# EAGLE board Powerswitch 2 Dioda (EAGLE 9.6.2)
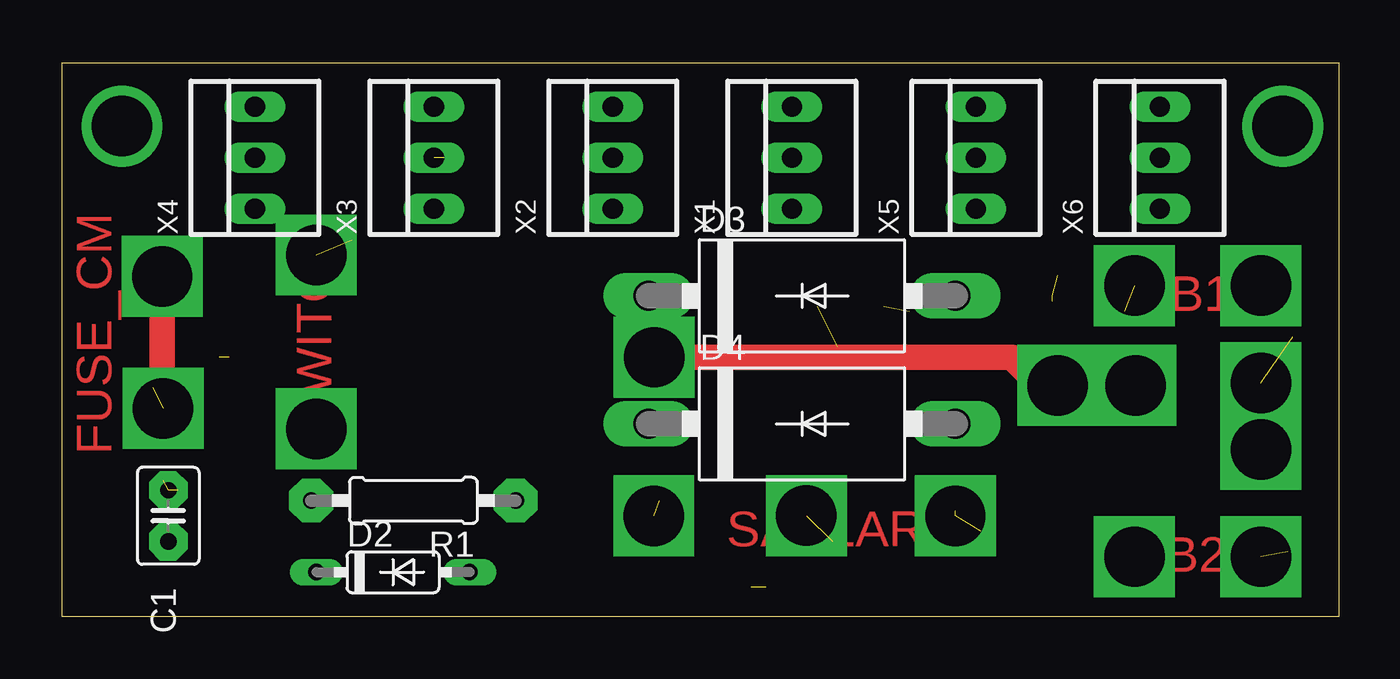
[diagram p0: board, top side]
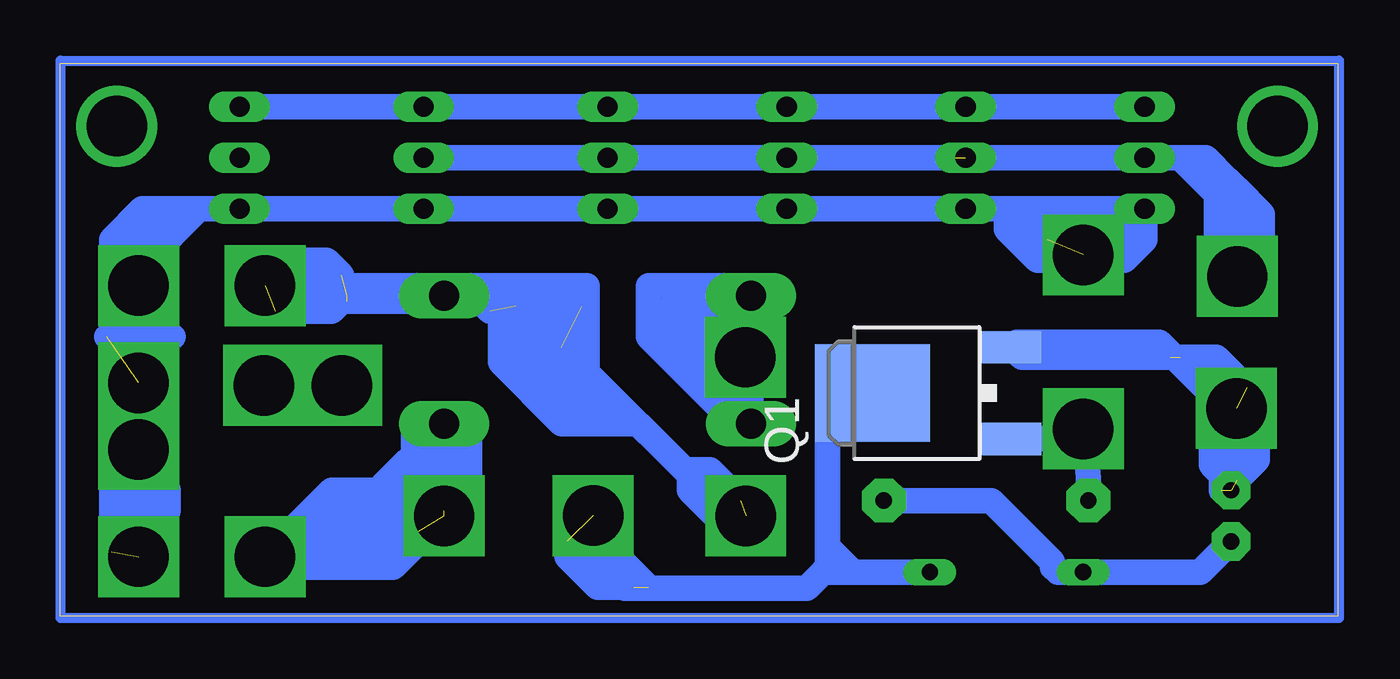
[diagram p1: board, bottom side, seen from below]

Size 63.46 x 27.46 mm. Coordinates in mm from the lower left corner, seen from the top.
Outline: 0,0 63.46,0 63.46,27.46 0,27.46 0,0
Copper layers (1*16): Top 0.035mm / dielectric 1.5mm / Bottom 0.035mm
Design rules "default": minimum track width 6mil, minimum drill 0.35mm, track to track 24mil, track to pad 24mil, pad to pad 24mil, via to via 24mil, smd to smd 24mil, copper to edge 40mil, drill to drill 6mil, minimum pad ring 10mil, minimum via ring 8mil, stop-mask expansion 4mil, vias tented up to drill 0mil, thermal gap 10mil

## Footprints (pad centres in the part's own frame; a part is rotated, then mirrored left to right if it is on the bottom)
C025-030X050 = drill 0.813 pad 1.905 octagon: 1 -1.27,0; 2 1.27,0
DO35-7 = drill 0.813 long: A 3.81,0; C -3.81,0
DO201-15 = drill 1.499 long: A 7.62,0; C -7.62,0
DPAK = smd 1.6 x 3: 1 -2.28,-5.31; 3 2.28,-5.31 | smd 4.826 x 5.715: 4 0,1.588
0207/10 = drill 0.813 pad 2.184 octagon: 1 -5.08,0; 2 5.08,0
22-23-2031 = drill 1 long: 1 -2.54,0; 2 0,0; 3 2.54,0

## Placement (x,y rotation side)
C1  [C025-030X050]  5.3,4.99 270 top
D2  1N4148DO35-7  [DO35-7]  16.46,2.19 0 top
D3  1N5400  [DO201-15]  36.78,15.91 0 top
D4  1N5400  [DO201-15]  36.78,9.56 0 top
Q1  35A/25V/8.5mΩ  [DPAK]  21.54,11.08 90 bottom
R1  [0207/10]  17.48,5.75 180 top
X1  22-23-2031  [22-23-2031]  36.27,22.77 90 top
X2  22-23-2031  [22-23-2031]  27.38,22.77 90 top
X3  22-23-2031  [22-23-2031]  18.49,22.77 90 top
X4  22-23-2031  [22-23-2031]  9.6,22.77 90 top
X5  22-23-2031  [22-23-2031]  45.42,22.77 90 top
X6  22-23-2031  [22-23-2031]  54.56,22.77 90 top

## Library data of the parts
C1 = rcl; SPICEPREFIX: C
D2-D4 = diode
Q1 = SparkFun-DiscreteSemi; PROD_ID: TRANS-09984
R1 = rcl; SPICEPREFIX: R
X1-X6 = con-molex; MF: MOLEX; MPN: 22-23-2031; OC_FARNELL: 1462950; OC_NEWARK: 30C0862

## Nets
B1: D3.A
B2: D4.A
DATA: X1.3 X2.3 X3.3 X4.3 X5.3 X6.3
GND: X1.1 X2.1 X3.1 X4.1 X5.1 X6.1
N$5: C1.2 D2.C R1.1
PC: D3.C D4.C
SWITCH: Q1.1 R1.2
VIN: D2.A Q1.4
VMOTOR: C1.1 Q1.3 X1.2 X2.2 X3.2 X4.2 X5.2

## Tracks (layer width: path | path; a pad name or v marks a point on that pad's centre or on a via)
B1  (via drill 3)  (6 unrouted)
  Bottom 1.27: v29.42,4.99 30.18,4.99 34.75,9.56 38.56,9.56 41.61,12.61 41.61,16.42 | 41.61,16.42 43.89,16.42 D3.A 44.91,16.42 v53.29,16.42 | 30.94,4.99 32.21,6.26 32.21,7.27 31.19,7.27 29.67,5.75 | 49.23,15.91 49.99,15.15 52.78,15.15 | 49.48,16.92 50.24,17.69 52.53,17.69 | 41.61,16.42 37.29,16.42 37.29,12.1 34.24,9.05 | 36.27,10.57 38.05,10.57 40.59,13.11 40.59,14.38 38.31,14.38 37.8,13.88 37.8,11.59 39.58,13.37 38.56,13.37 | 37.54,15.4 40.85,15.4 | 42.12,15.15 42.62,15.65 49.23,15.65
B2  (via drill 3)  (2 unrouted)
  Bottom 1.27: 44.4,9.05 44.4,6.26 45.93,6.26 | 44.4,9.05 D4.A | 45.93,6.26 49.99,6.26 v53.29,2.95 53.55,2.7 53.55,2.45 46.94,2.45 v44.4,4.99 | 44.4,5.24 49.99,5.24 52.28,2.95 | 45.67,4.22 45.93,3.97 50.75,3.97 51.26,3.46 51.26,3.21 47.45,3.21 47.2,3.46 | 43.13,6.51 43.13,9.05 44.4,9.05 | 44.91,9.05 45.93,9.05 45.93,6.26 | 45.93,6.26 45.16,7.02 45.16,8.54 | 47.45,6.51 44.91,9.05 | 44.91,9.05 44.4,9.05
DATA
  Bottom 1.27: X4.3 X3.3 X2.3 X1.3 X5.3 X6.3
GND  (via drill 3)  (3 unrouted)
  Bottom 1.27: 16.46,20.23 16.72,20.23 | 16.72,20.23 X3.1 X2.1 X1.1 X5.1 X6.1 | v59.58,2.95 v59.58,8.29 v59.58,11.59 v59.58,16.42 59.58,18.72 58.07,20.23 56.59,20.23 | 60.91,3.21 60.91,6.26 58.12,6.26 58.12,5.24 58.88,5.24 59.13,5.49 60.15,5.49 | 57.86,13.88 61.17,13.88 | X4.1 9.6,18.7 10.62,17.69 14.94,17.69 16.46,19.21 16.46,20.23 | 10.37,20.23 16.46,20.23 | 16.72,20.23 15.7,19.21 10.62,19.21 10.62,18.7 14.43,18.7 | X6.1 56.59,20.23 | 56.59,20.23 59.13,17.69 | X6.1 59.39,20.23 60.91,18.7 60.91,16.67 60.4,16.67 60.4,18.45
  other vias: 12.65,17.94
N$1  (via drill 3 pad 3.1)
  other vias: 3,24.34
N$2  (via drill 3 pad 3.1)
  other vias: 60.66,24.34
N$3
  Bottom 0.508: -0.05,27.59 -0.05,-0.09 63.45,-0.09 63.45,27.59 -0.05,27.59
N$5
  Bottom 1.27: C1.2 6.83,2.19 D2.C 13.92,2.19 14.18,2.45 14.18,2.7 17.22,5.75 R1.1
PC  (via drill 3)
  Top 1.27: v49.48,11.47 48.59,11.47 47.2,12.86 v29.44,12.86
  Bottom 1.27: D3.C 29.16,12.86 | 29.16,12.86 29.16,10.32 | 29.16,10.32 D4.C 29.16,10.57 29.92,11.34 | 29.16,12.86 v29.44,12.86 | v49.48,11.47 v53.36,11.47 | D3.C 29.67,16.42 34.24,16.42 34.24,13.88 30.43,10.07 29.42,10.07 29.16,10.32 | D3.C 29.92,15.15 33.48,15.15 | v29.44,12.86 30.71,14.13 33.48,14.13 | v29.44,12.86 32.21,12.86 32.46,13.11 | v29.44,12.86 30.45,11.84 31.19,11.84
SWITCH  (via drill 3)
  Bottom 1.27: R1.2 12.42,8.31 12.91,8.8 Q1.1 | 13.03,8.92 13.41,9.3 v12.65,9.3
VIN  (via drill 3)  (2 unrouted)
  Bottom 1.27: 20.53,2.19 D2.A 24.08,2.19 | Q1.4 25.35,11.08 25.35,9.05 | 25.35,9.05 25.35,3.46 | 25.35,3.46 25.35,2.45 | 24.08,2.19 25.61,2.19 25.35,2.45 | v37,5 37,2.97 35.43,1.4 26.37,1.4 25.35,2.41 25.35,2.45 | 35.77,3.46 35.77,2.95 34.24,1.43 | 35,1.43 36.78,1.43 38.31,2.95 38.31,3.72 | 25.35,9.05 23.07,11.34 | 24.08,2.19 25.35,3.46
VMOTOR  (via drill 3)  (5 unrouted)
  Top 1.27: v5,16.88 5,10.37 v5.05,10.32
  Bottom 1.27: 19,22.77 X4.2 7.83,22.77 | X3.2 X2.2 X1.2 X5.2 | 7.83,22.77 6.56,22.77 6.05,22.26 | 6.05,22.26 5.03,21.24 | 5.03,21.24 5.03,16.91 v5,16.88 6.05,17.92 6.05,20.99 | v5.05,10.32 5.05,9.3 | Q1.3 15.98,13.62 8.88,13.62 5.59,10.32 v5.05,10.32 | v5.05,10.32 5.05,6.51 C1.1 | 5.03,21.24 3.76,19.97 3.76,17.43 | 6.05,20.99 6.05,22.26 | 6.05,20.99 7.83,22.77 | 8.33,12.86 15.7,12.86 16.21,13.37 | 4.52,11.34 6.05,12.86 7.83,12.86 | 5.03,6.76 4.02,7.78 4.02,10.07 | 5.79,6.26 5.79,7.02 6.3,7.53 6.3,10.32

## Text on the board
Top: B1 | SWITCH | FUSE_CM | SAKLAR | B2